# Altium PCB Motorized_Blinds_PCB.PcbDoc
Units mm, origin at the board's own origin, x right, y up, seen from the top; angles counter-clockwise.
Board outline 73 x 27.84 mm, 4 copper layers (Top Layer, Mid Layer 2, Mid Layer 3, Bottom Layer), stack 1.473 mm thick; 21 components, 26 nets, 98 pads, 38 vias.
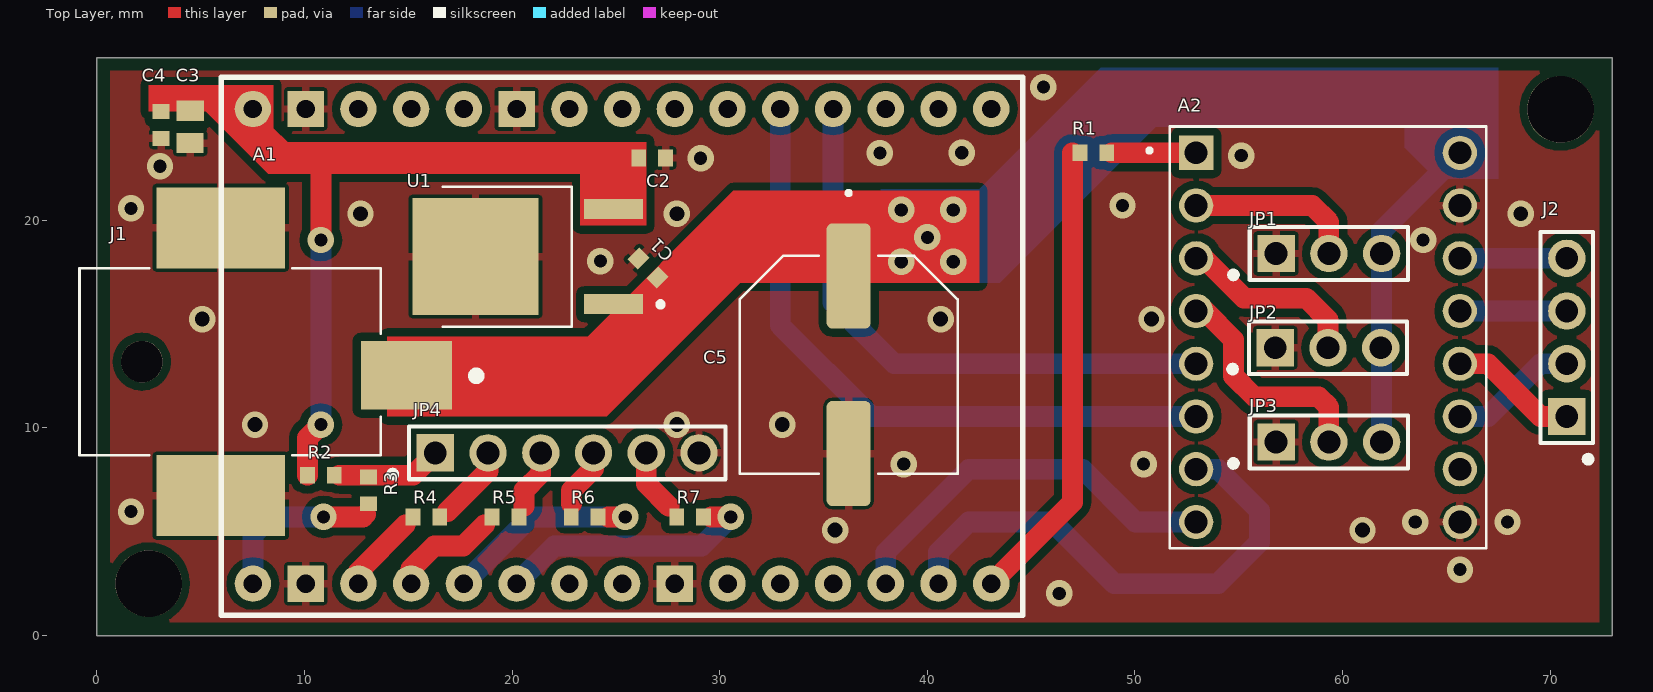
[diagram p0: Top Layer view]
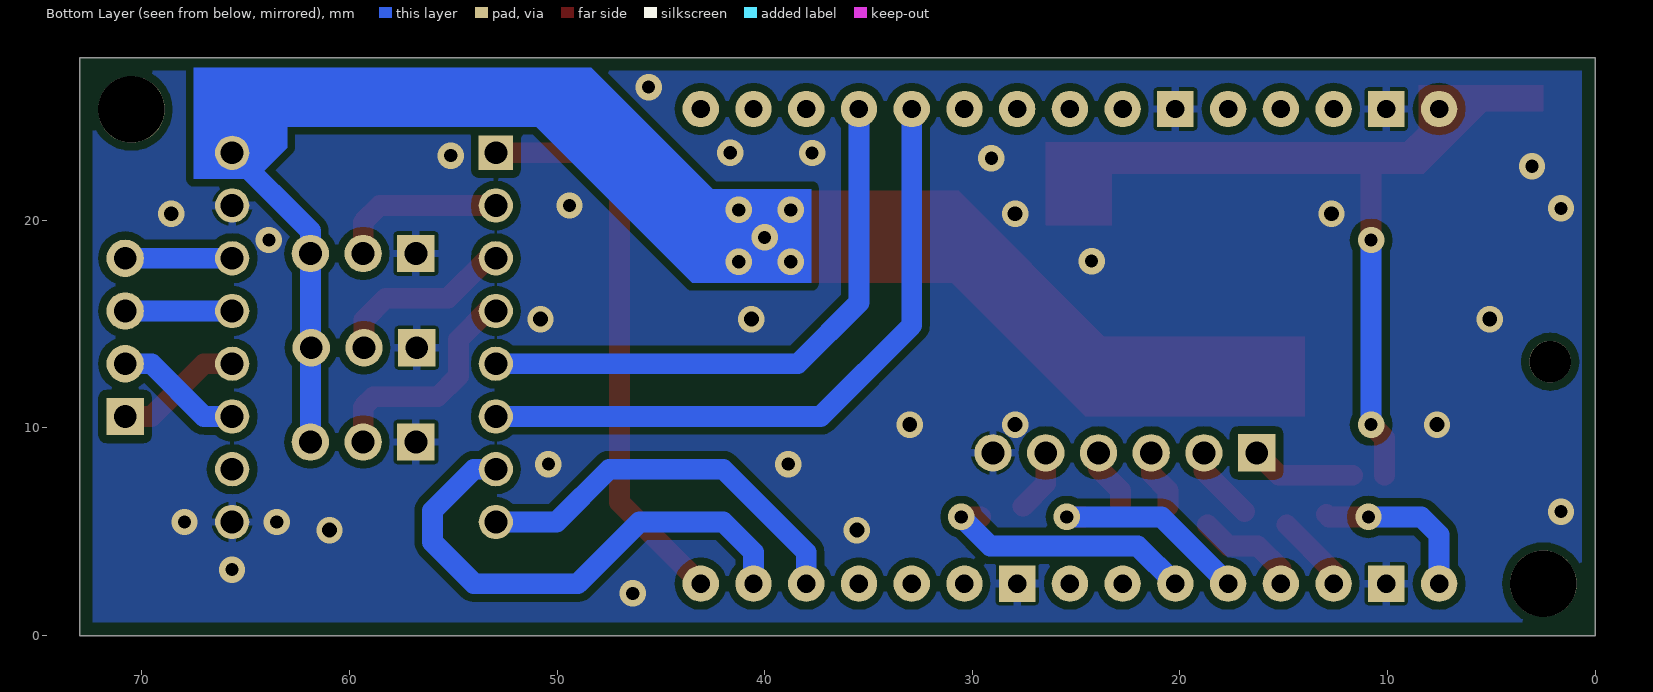
[diagram p1: Bottom Layer view, seen from below]
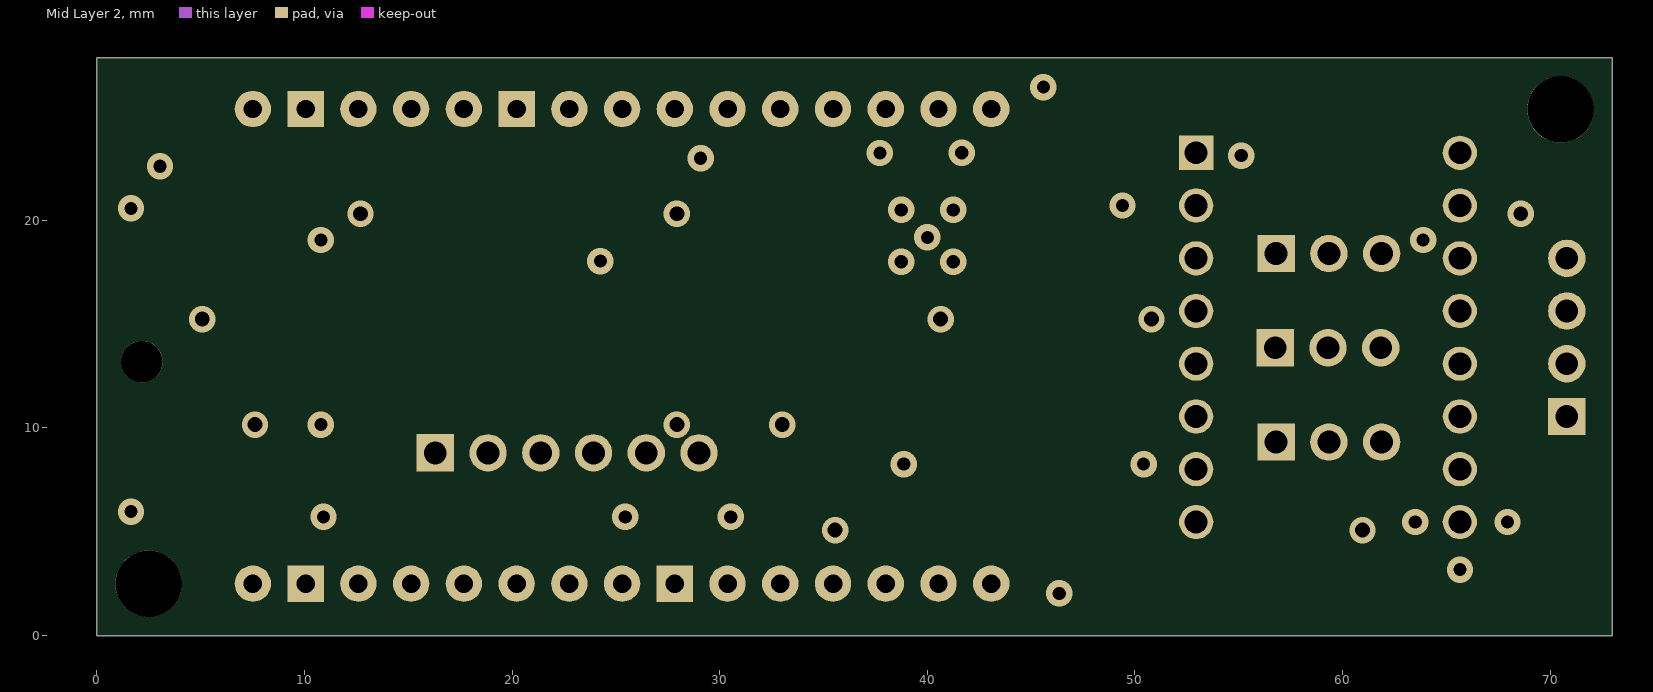
[diagram p2: Mid Layer 2]
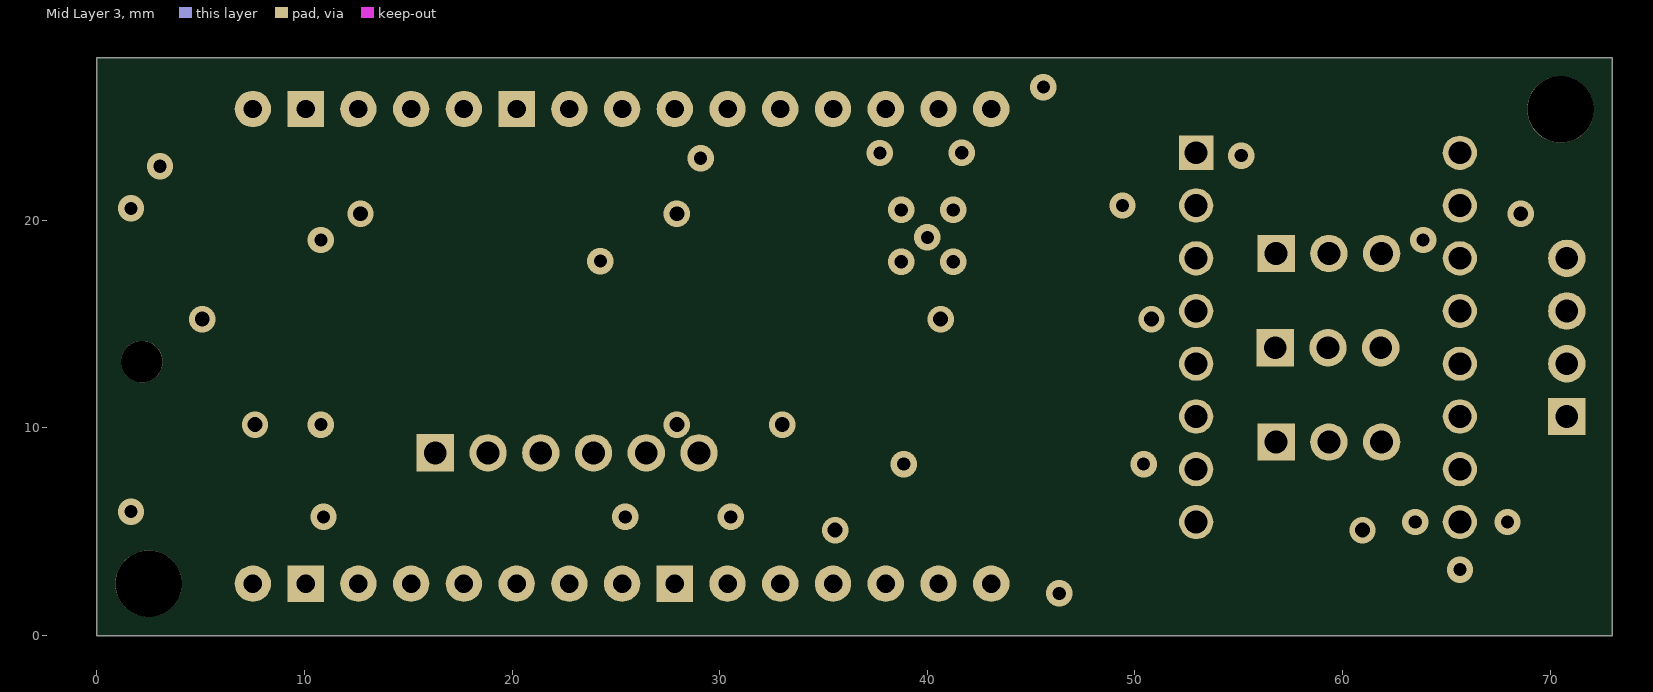
[diagram p3: Mid Layer 3]
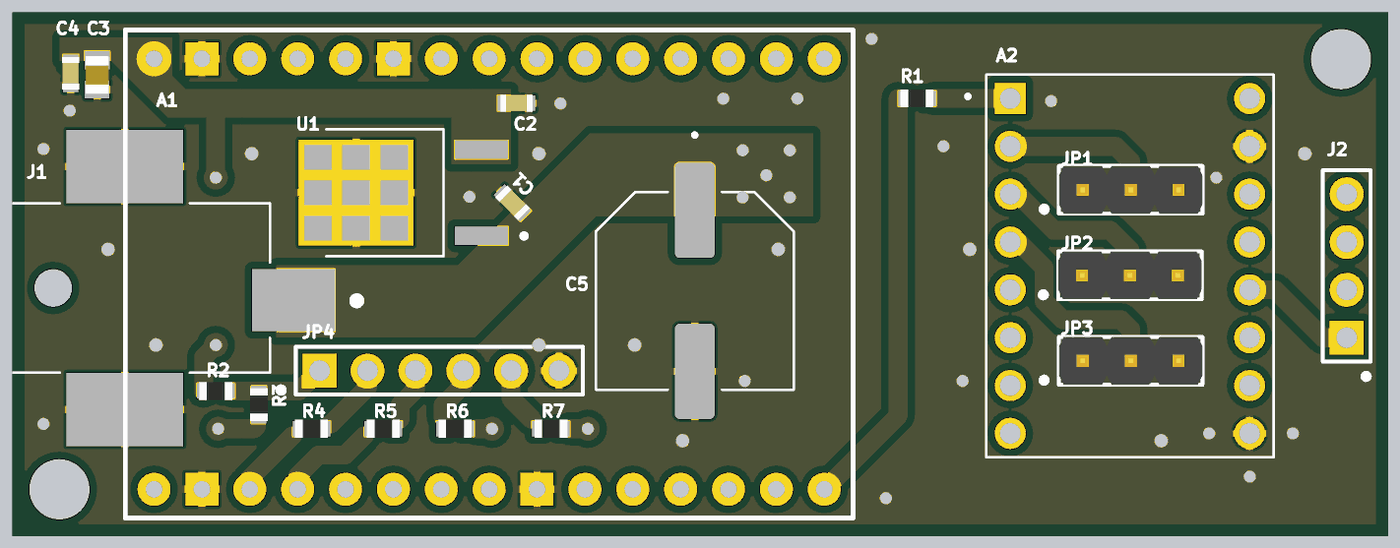
[diagram p4: 3D render of the assembled board from above, using the file's embedded part models]

## Layer stack, top to bottom
Top Solder: solder mask 0.0254, Solder Resist, Dk 4
Top Layer: signal copper 0.0457
Dielectric 1: prepreg 0.1204, PP-006, Dk 4.2
Mid Layer 2: signal copper 0.0305
Dielectric 2: core 1.0795, FR-4, Dk 4.31
Mid Layer 3: signal copper 0.0305
Dielectric 3: prepreg 0.1204, PP-006, Dk 4.2
Bottom Layer: signal copper 0.0457
Bottom Solder: solder mask 0.0254, Solder Resist, Dk 4

## Board outline
0,0 73,0 73,27.838 0,27.838

## Design rules (kind name [scope] priority, off if disabled: settings)
BoardOutlineClearance [All] p1: gap=0.127 ignorepadtopadclearanceinfootprint=FALSE except(0: Arc-SplitContinuation Track-SplitContinuation SMDPad-SplitContinuation THPad-SplitContinuation Via-SplitContinuation Fill-SplitContinuation Poly-SplitContinuation Region-SplitContinuation Text-OutlineEdge Text-CavityEdge Text-CutoutEdge Text-SplitBarrior Text-SplitContinuation; 0.635: Arc-OutlineEdge Arc-CavityEdge Arc-CutoutEdge Track-OutlineEdge Track-CavityEdge Track-CutoutEdge Via-OutlineEdge Via-CavityEdge Via-CutoutEdge Fill-OutlineEdge Fill-CavityEdge Fill-CutoutEdge Poly-OutlineEdge Poly-CavityEdge Poly-CutoutEdge)
Clearance GND_Fill_Clearance [InPolygon] p1: gap=0.381 ignorepadtopadclearanceinfootprint=FALSE
Clearance Clearance_USB_DIF_PAIR_POUR_CLEARANCE [InDifferentialPairClass('All Differential Pairs') vs InPolygon] p2: gap=0.254 ignorepadtopadclearanceinfootprint=FALSE
Clearance Keepout [IsKeepOut] p3: gap=0 ignorepadtopadclearanceinfootprint=FALSE
Clearance [All] p4: gap=0.254 ignorepadtopadclearanceinfootprint=FALSE
ComponentClearance [All] p1 off: gap=0.254 collisioncheckmode=3 verticalgap=0.254 showdistances=FALSE
DiffPairsRouting [InDifferentialPairClass('All Differential Pairs')] p1: maxlimit=0.254 minlimit=0.191 mostfreqgap=0.254 toplayer_maxgap=0.191 toplayer_prefgap=0.191 toplayer_minwidth=0.178 toplayer_maxwidth=0.178 toplayer_prefwidth=0.178 midlayer1_mingap=0.254 midlayer1_minwidth=0.381 midlayer1_maxwidth=0.381 midlayer1_prefwidth=0.381 midlayer4_mingap=0.254 midlayer4_minwidth=0.381 midlayer4_maxwidth=0.381 midlayer4_prefwidth=0.381 bottomlayer_maxgap=0.191 bottomlayer_prefgap=0.191 bottomlayer_minwidth=0.178 bottomlayer_maxwidth=0.178 bottomlayer_prefwidth=0.178 maxuncoupledlength=12.7
HoleSize [All] p1: absolutevalues=TRUE maxlimit=6.35 minlimit=0.025 maxpercent=80.000 minpercent=20.000
MinimumSolderMaskSliver [All] p1: minsoldermaskwidth=0.076
PlaneClearance [All] p1: clearance=0.127
PlaneConnect [All] p1: planeconnectstyle=Relief reliefexpansion=0.508 reliefentries=4 reliefconductorwidth=0.508 reliefairgap=0.254
PolygonConnect PolygonConnect_Via [IsVia] p1: connectstyle=Direct reliefconductorwidth=0.254 reliefentries=4 polygonreliefangle="90 Angle" airgapwidth=0.127
PolygonConnect [All] p2: connectstyle=Relief reliefconductorwidth=0.381 reliefentries=4 polygonreliefangle="90 Angle" airgapwidth=0.152
RoutingVias [All] p1: holewidth=0.635 width=1.27 viastyle="Through Hole" minholewidth=0.381 minwidth=0.508 maxholewidth=2.032 maxwidth=2.54
ShortCircuit "Allow Stringers" [not InAnyNet vs not InAnyNet] p1: allowed=TRUE
ShortCircuit [All] p2: allowed=FALSE
SolderMaskExpansion [All] p1: expansion=0.051
Width [All] p1: maxlimit=3 minlimit=0.5 preferedwidth=1
23 further rules are at their usual default settings.

## Components (designator, comment, footprint, x,y, rotation, side; value= is the part's Value field where it differs from the comment)
A1 "NodeMCU DevKit v1.0" "NodeMCU DevKit v1.0 - No Labels" 7.52,2.5 r90 top locked
A2 "DRV8825" IC_DRV8825_STEPPER_MOTOR_DRIVER_CARRIER 59.3,14.36 r0 top
C1 "1uF" C0603 26.544,17.706 r225 top
C2 "4.7uF" C0603 26.75,23 r90 top
C3 "10uF" C0805 4.5,24.5 r0 top
C4 "1uF" C0603 3.098,24.589 r0 top
C5 "100uF" CAPAE1050X1050N 36.21,13.04 r270 top
J1 "PJ-036AH-SMT-TR" CUI_PJ-036AH-SMT-TR 14.92,12.54 r0 top
J2 "" JP_J4_2.54mm 70.8,13.09 r180 top
JP1 "61300311121" JP_61300311121 59.34,18.4 r90 top
JP2 "61300311121" JP_61300311121 59.3,13.86 r90 top
JP3 "61300311121" JP_61300311121 59.34,9.32 r90 top
JP4 "" JP_J6_2.54mm 18.845,8.8 r90 top
R1 "0" R0603 48,23.25 r90 top
R2 "0" R0603 10.795,7.72 r270 top
R3 "0" R0603 13.081,6.995 r0 top
R4 "0" R0603 15.875,5.715 r270 top
R5 "0" R0603 19.685,5.715 r270 top
R6 "0" R0603 23.495,5.715 r90 top
R7 "0" R0603 28.575,5.715 r90 top
U1 "MC7805BDTRKG" DPAK229P990X238-4N 20.75,18.25 r90 top

## Footprints (in the part's own frame and the unit in brackets; to place one, negate y for a bottom-side part, rotate by r counter-clockwise, add the part's x,y. Pads: shape width x height; smd on the part's side, far side on the other; paste and mask are expansions set on the pad)
C0603 [mm]
  rect 0.81x0.71 smd: 1(0,0.645) 2(0,-0.645)
  body extent -0.45,-0.85 0.45,0.85, height 0.9
C0805 [mm]
  rect 1.32x0.98 smd: 1(0,0.78)
  rect 1.3x0.95 smd: 2(0,-0.78)
  body extent -0.62,-1 0.63,1, height 1
CAPAE1050X1050N [mm]
  rrect25% 5.06x2.11 smd: 1(-4.275,0) 2(4.275,0)
  silkscreen extent -8.37,-5.25 5.25,5.25
CUI_PJ-036AH-SMT-TR [mm]
  rect 4.4x3.3 smd: 1(0,0)
  rect 6.2x3.9 smd: 2(-8.95,7.1) 3(-8.95,-5.8)
  round 2 hole 2 unplated: ""(-12.75,0.65)
  silkscreen extent -15.75,-3.85 3.56,5.15
DPAK229P990X238-4N [mm]
  rect 0.97x2.83 smd: 1(-2.29,-4.14) 3(2.29,-4.14)
  rect 5.63x6.09 smd paste-4: 2(0,2.51)
  silkscreen extent -3.37,-6.5 3.37,4.09
IC_DRV8825_STEPPER_MOTOR_DRIVER_CARRIER [mm]
  rect 1.65x1.65 hole 1.1: 1(-6.35,8.89)
  round 1.65 hole 1.1: 2(-6.35,6.35) 3(-6.35,3.81) 4(-6.35,1.27) 5(-6.35,-1.27) 6(-6.35,-3.81) 7(-6.35,-6.35) 8(-6.35,-8.89) 9(6.35,-8.89) 10(6.35,-6.35) 11(6.35,-3.81) 12(6.35,-1.27) 13(6.35,1.27) 14(6.35,3.81) 15(6.35,6.35) 16(6.35,8.89)
  silkscreen extent -8.7,-10.16 7.62,10.16
JP_61300311121 [mm] "CONN HEADER VERT 3POS 2.54MM"
  rect 1.8x1.8 hole 1.1: 1(0,2.54)
  round 1.8 hole 1.1: 2(0,0) 3(0,-2.54)
  silkscreen extent -1.33,-3.81 1.27,4.9, body extent -1.27,-3.81 1.27,3.81, height 8.55
JP_J4_2.54mm [mm] "CONN HEADER VERT 4POS 2.54MM"
  rect 1.8x1.8 hole 1.1: 1(0,2.54)
  round 1.8 hole 1.1: 2(0,0) 3(0,-2.54) 4(0,-5.08)
  silkscreen extent -1.33,-6.35 1.27,4.9
JP_J6_2.54mm [mm] "CONN HEADER VERT 6POS 2.54MM"
  rect 1.8x1.8 hole 1.1: 1(0,2.54)
  round 1.8 hole 1.1: 2(0,0) 3(0,-2.54) 4(0,-5.08) 5(0,-7.62) 6(0,-10.16)
  silkscreen extent -1.33,-11.43 1.27,4.9
"NodeMCU DevKit v1.0 - No Labels" [mil]
  round 69 hole 35: 1(0,0) 3(0,-200) 4(0,-300) 5(0,-400) 6(0,-500) 7(0,-600) 8(0,-700) 10(0,-900) 11(0,-1000) 12(0,-1100) 13(0,-1200) 14(0,-1300) 15(0,-1400) 16(900,-1400) 17(900,-1300) 18(900,-1200) 19(900,-1100) 20(900,-1000) 21(900,-900) 22(900,-800) 23(900,-700) 24(900,-600) 26(900,-400) 27(900,-300) 28(900,-200) 30(900,0)
  rect 69x69 hole 35: 2(0,-100) 9(0,-800) 25(900,-500) 29(900,-100)
  silkscreen extent -60,-1460 960,60
R0603 [mm]
  rect 0.81x0.71 smd: 1(0,0.645) 2(0,-0.645)
  body extent -0.48,-0.87 0.47,0.88, height 0.55

## Part data
A2: library part DRV8825_STEPPER_MOTOR_DRIVER_CARRIER, "DRV8825 Motor Controller/Driver Power Management Evaluation Board", Manufacturer=Pololu, MFPN="DRV8825 STEPPER MOTOR DRIVER CARRIER"
C1 C2 C3 C4: library part CAP-NoPol, "SMCAP NoPol", Vmax=30V
C5: library part CAP-Pol_MAL214699103E3, "CAP ALUM 100UF 20% 50V SMD", Manufacturer=Vishay, MFPN=MAL214699103E3, Vmax=50V
J1: "2.0 x 6.3 mm, 5.0 A, Horizontal, Surface Mount _SMT_, Dc Power Jack Connector", Manufacturer="CUI Devices", MFPN=PJ-036AH-SMT-TR
J2: library part JP_J4_2.54mm, "CONN HEADER VERT 4POS 2.54MM"
JP1 JP2 JP3: library part JP_61300311121, "CONN HEADER VERT 3POS 2.54MM", MFPN=61300311121
JP4: library part JP_J6_2.54mm, "CONN HEADER VERT 6POS 2.54MM"
R1 R2 R3 R4 R5 R6 R7: library part Res, "SMRES"
U1: "Linear Voltage Regulator IC 1 Output 1A DPAK", Manufacturer="ON Semiconductor", MFPN=MC7805BDTRKG
A1: MFPN="NodeMCU DevKit v1.0"

## Free pads (board coordinates)
  round 3.2 hole 3.2 unplated: 0(2.5,2.5) 0(70.5,25.338)

## Via types
v1: diameter 1.27, hole 0.635, Top Layer to Bottom Layer, tented both sides, 27 vias
v2: diameter 1.27, hole 0.711, Top Layer to Bottom Layer, tented both sides, 11 vias

## Nets (pads, with @x,y where several pads share a name; then routed paths per layer and width w, separated by ;. In a path a pad name is that pad's centre, name@x,y a point inside that pad or via, vN(x,y) a via of type N, cw(c..) or ccw(c..) an arc to the next point about the centre after c; other vN are vias at no path point)
5V: A1.30 C2.1 C3.1 C4.1 R2.2 U1.3 | length 15.5
  Top Layer w1: R2.2 10.15,9.515 v1(10.795,10.16) ; v1(10.795,19.05) 10.795,23
  Bottom Layer w1: v1(10.795,10.16) v1(10.795,19.05)
12V: A2.16 C1.1 C5.1 J1.1 JP1.3 JP2.3 JP3.3 U1.1 | length 15.5
  Bottom Layer w1: JP3.3 JP1.3 61.88,19.48 A2.16
  other v1: 38.75,18 41.25,18 40.005,19.177 38.75,20.5 41.25,20.5
DIR: A1.13 A2.8 | length 19.2
  Bottom Layer w1: A1.13 38,4.01 42,8.01 47.49,8.01 50.03,5.47 A2.8
E\N\: A1.15 R1.1 | length 22.4
  Top Layer w1: A1.15 47,6.42 R1.1@47,23.25
GND: A1.2 A1.9 A1.25 A1.29 A2.9 A2.15 C1.2 C2.2 C3.2 C4.2 C5.2 J1.2 J1.3 JP1.1 JP2.1 JP3.1 JP4.6 U1.2
  other v1: 46.355,2.032 65.659,3.175 63.5,5.47 67.945,5.47 1.651,5.969 38.862,8.255 50.419,8.255 24.257,18.034 63.881,19.05 1.651,20.574 49.403,20.71 3.048,22.606 29.083,22.987 55.118,23.114 37.719,23.241 41.656,23.25 45.593,26.416
  other v2: 35.56,5.08 60.96,5.08 7.62,10.16 27.94,10.16 33.02,10.16 5.08,15.24 40.64,15.24 50.8,15.24 12.7,20.32 27.94,20.32 68.58,20.32
J_3V3: A1.1 R3.2 | length 8.2
  Top Layer w1: v1(10.922,5.715) 12.827,5.715 12.954,5.842
  Bottom Layer w1: A1.1 7.52,4.853 8.382,5.715 v1(10.922,5.715)
NetA1_3: A1.3 R4.2 | length 3.8
  Top Layer w1: A1.3 12.6,3.075 14.859,5.334
NetA1_4: A1.4 R5.2 | length 5.1
  Top Layer w1: A1.4 15.14,3.202 16.256,4.318 17.653,4.318 18.669,5.334
NetA1_5: A1.5 R6.2 | length 9.9
  Top Layer w1: 24.638,5.715 v1(25.453,5.715)
  Bottom Layer w1: A1.5 20.895,5.715 v1(25.453,5.715)
NetA1_6: A1.6 R7.2 | length 12.6
  Top Layer w1: 29.591,5.715 v1(30.533,5.715)
  Bottom Layer w1: A1.6 22.038,4.318 29.136,4.318 v1(30.533,5.715)
NetA2_1: A2.1 R1.2 | length 4.1
  Top Layer w1: R1.2@48.895,23.25 A2.1
NetA2_2: A2.2 JP1.2 | length 8.2
  Top Layer w1: A2.2 58.54,20.71 59.34,19.91 JP1.2
NetA2_3: A2.3 JP2.2 | length 8.9
  Top Layer w1: A2.3 53.33,18.17 55.25,16.25 58.25,16.25 59.3,15.2 JP2.2
NetA2_4: A2.4 JP3.2 | length 11.2
  Top Layer w1: A2.4@53.08,15.5 A2.4 53.37,15.63 54.75,14.25 54.75,12.5 55.75,11.5 58.84,11.5 59.34,11 JP3.2
NetA2_11: A2.11 J2.2 | length 6.2
  Bottom Layer w1: A2.11 67,10.55 69.54,13.09 J2.2
NetA2_12: A2.12 J2.1 | length 6.2
  Top Layer w1: A2.12 67,13.09 69.54,10.55 J2.1
NetA2_13: A2.13 J2.3 | length 5.2
  Bottom Layer w1: A2.13 J2.3
NetA2_14: A2.14 J2.4 | length 5.2
  Bottom Layer w1: A2.14 J2.4
NetJP4_1: JP4.1 R2.1 R3.1 | length 5.1
  Top Layer w1: R2.1@11.684,7.72 15.225,7.72 JP4.1
NetJP4_2: JP4.2 R4.1 | length 3.6
  Top Layer w1: 16.891,5.969 18.845,7.923 JP4.2
NetJP4_3: JP4.3 R5.1 | length 2.9
  Top Layer w1: 20.574,6.223 20.574,6.985 21.385,7.796 JP4.3
NetJP4_4: JP4.4 R6.1 | length 2.9
  Top Layer w1: 22.86,6.35 22.86,6.985 23.925,8.05 JP4.4
NetJP4_5: JP4.5 R7.1 | length 3
  Top Layer w1: JP4.5 26.465,7.317 27.559,6.223
R\S\T\: A1.19 A2.5 | length 28
  Bottom Layer w1: A1.19 35.46,16.04 38.41,13.09 A2.5
S\L\P\: A1.20 A2.6 | length 32.3
  Bottom Layer w1: A1.20 32.92,14.94 37.31,10.55 A2.6
STEP: A1.14 A2.7 | length 25
  Bottom Layer w1: A1.14 40.54,4.01 42,5.47 46.03,5.47 49,2.5 54,2.5 56,4.5 56,6.01 54,8.01 A2.7
pads on no net: A1.7 A1.8 A1.10 A1.11 A1.12 A1.16 A1.17 A1.18 A1.21 A1.22 A1.23 A1.24 A1.26 A1.27 A1.28 A2.10 J1.

## Polygon pours and split planes (outlines as drawn)
GND on Bottom Layer "Bot Layer-GND" (solid, remove dead copper, pour order 0): 0,0 73,0 73,27.85 0,27.85
GND on Top Layer "Top Layer-GND" (solid, remove dead copper, pour order 2): 0,0 73,0 73,27.825 0,27.825

## Other copper
Top Layer:
  region net 12V: 14,14.4 23.65,14.4 30.665,21.415 42.5,21.415 42.5,17 31,17 24.55,10.55 14,10.55
  region net 5V: 26.467,22.25 26.468,19.75 23.292,19.75 23.292,22.25 10.31,22.25 8.25,22.25 5.25,25.25 2.5,25.25 2.5,26.5 8.5,26.5 8.5,24.444 9.194,23.75 11.25,23.75 26.468,23.75
Mid Layer 2:
  text "LAYER 2 - INNER SIGNAL 2" at 19.906,-16.891 h2.54
  text "DRL-1200P-C" at 36.199,-22.606 h2.54
Mid Layer 3:
  text "LAYER 3 - INNER SIGNAL 3" at 19.906,-16.891 h2.54
  text "DRL-1200P-C" at 36.199,-22.606 h2.54
Bottom Layer:
  region net 12V: 37.75,17 43.5,17 51,24.5 63,24.5 63,23.5 64.5,22 67.5,22 67.5,27.35 48.35,27.35 42.5,21.5 37.75,21.5

## Silkscreen, mask and mechanical layers (free items; w line width, h text height)
Board Outline:
  the board outline again, w0.127
Mechanical 3:
  text "TOP ASSEMBLY" at 35.384,-17.383 h2.54
Mechanical 4:
  text "BOTTOM ASSEMBLY" at 13.379,-19.746 h2.54